# Altium PCB PCB1.PcbDoc
Units mm, origin at the board's own origin, x right, y up, seen from the top; angles counter-clockwise.
Board outline 150.1 x 97.45 mm, 2 copper layers (Top Layer, Bottom Layer); 78 components, 57 nets, 228 pads, 12 vias.
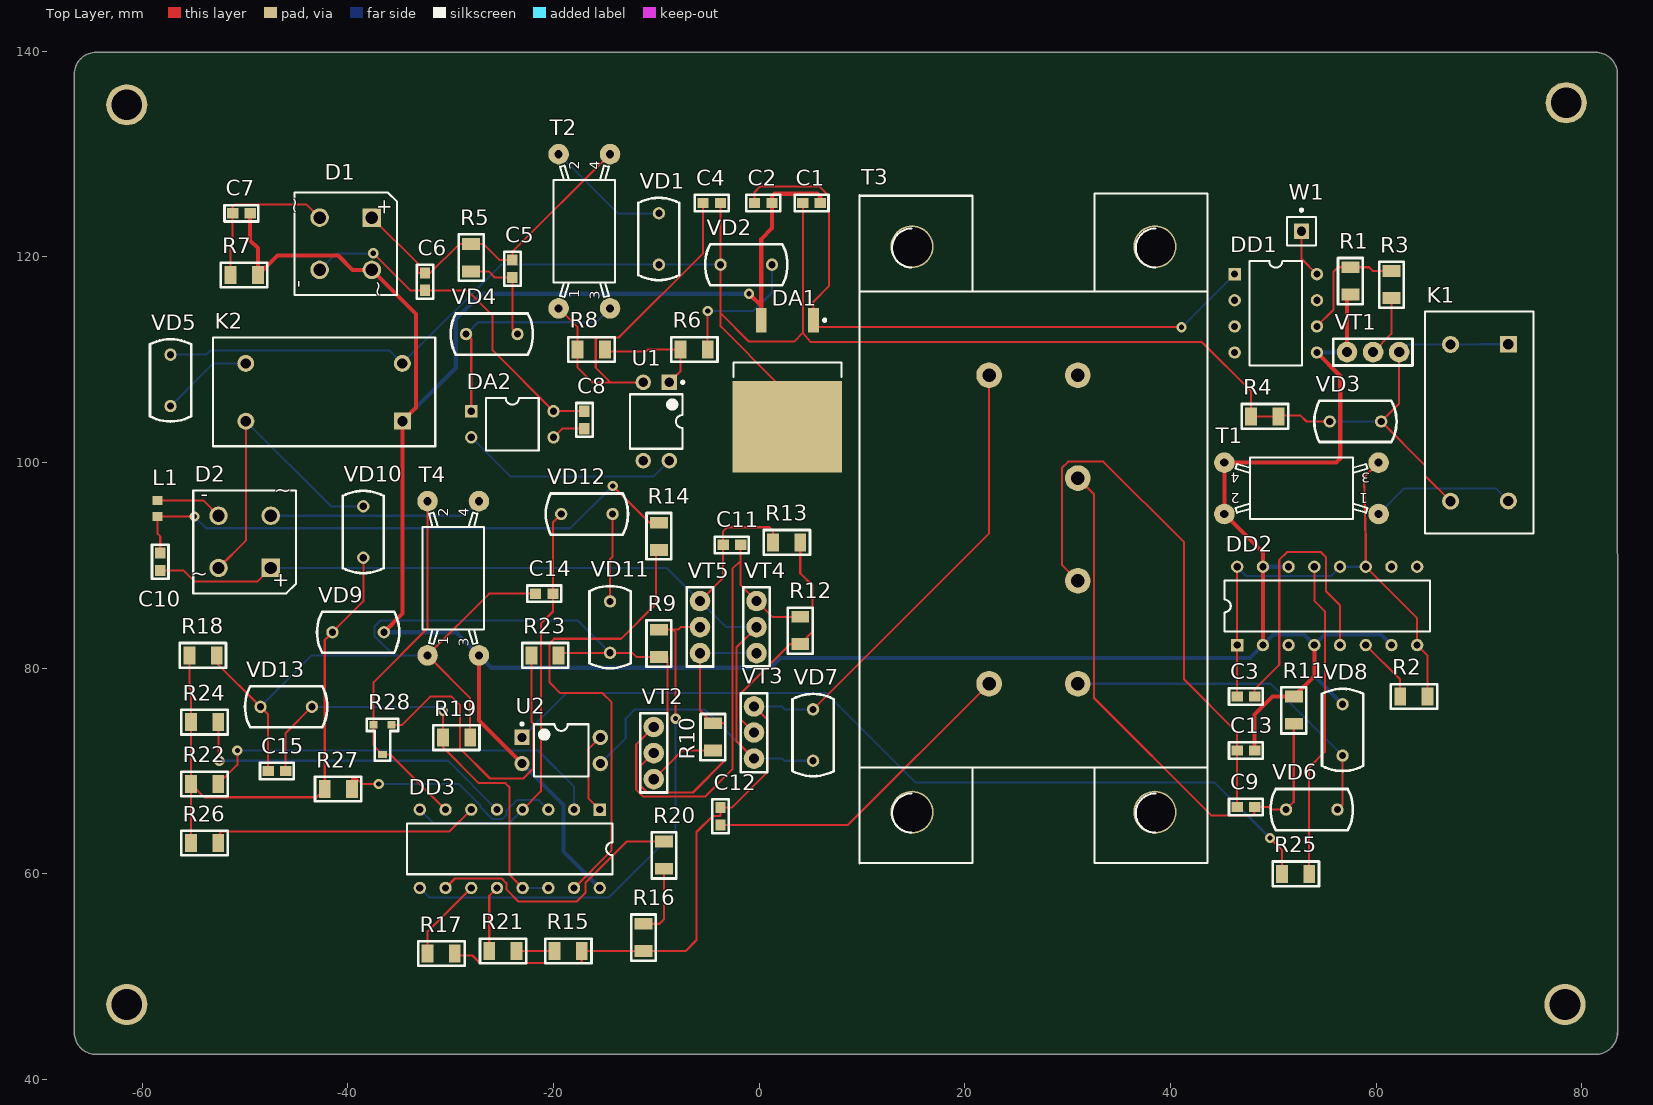
[diagram p0: Top Layer view]
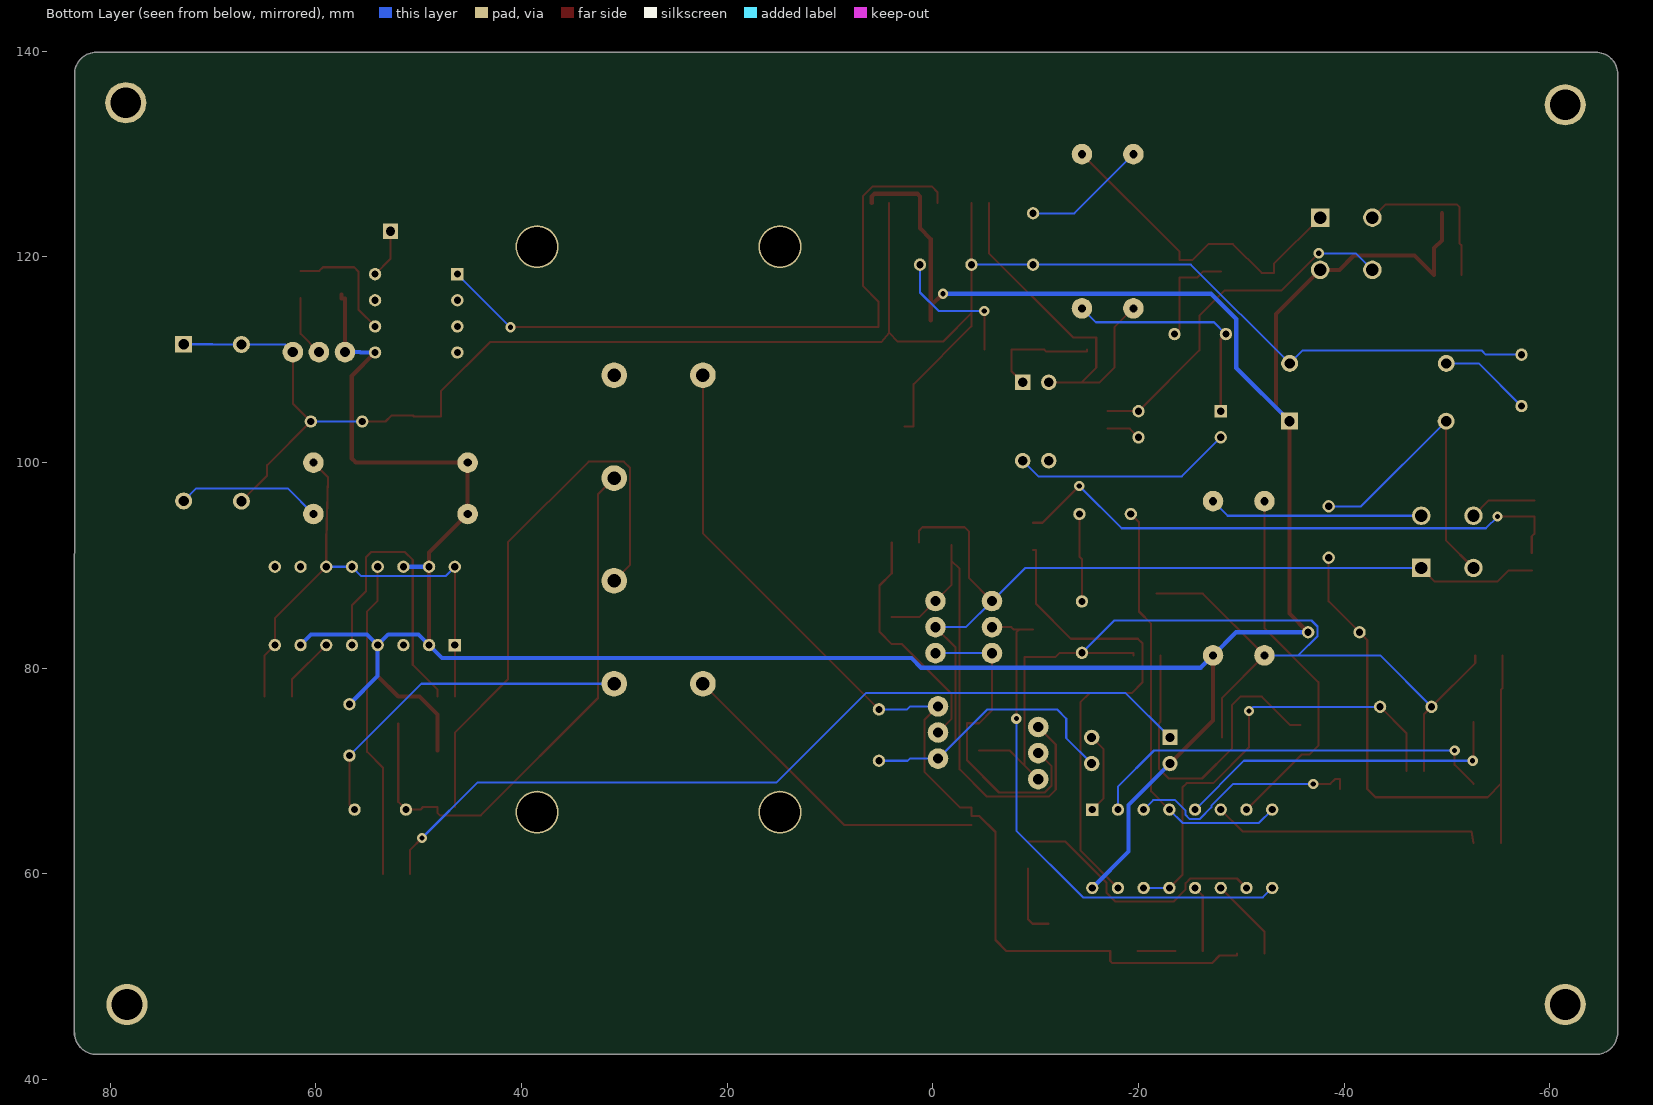
[diagram p1: Bottom Layer view, seen from below]

## Layer stack, top to bottom
Top Solder: solder mask 0.0102, Solder Resist, Dk 3.5
Top Layer: signal copper 0.0356
Dielectric 1: dielectric 0.32, FR-4, Dk 4.8
Bottom Layer: signal copper 0.0356
Bottom Solder: solder mask 0.0102, Solder Resist, Dk 3.5

## Board outline
-64.5,42.45 cw(c-64.5,44.55) -66.6,44.55 -66.6,44.75 -66.6,137.8 cw(c-64.5,137.8) -64.502,139.9 -64.5,139.9 81.376,139.9 cw(c81.375,137.8) 83.475,137.8 83.475,138 83.5,44.3 83.475,44.55 cw(c81.375,44.55) 81.375,42.45

## Design rules (kind name [scope] priority, off if disabled: settings)
Clearance [All] p1: gap=0.2 ignorepadtopadclearanceinfootprint=FALSE
ComponentClearance [All] p1: gap=0.3 collisioncheckmode=3 verticalgap=0.3 showdistances=FALSE
HoleSize [All] p1: absolutevalues=TRUE maxlimit=3.5 minlimit=0.025 maxpercent=80.000 minpercent=20.000
MinimumSolderMaskSliver [All] p1: minsoldermaskwidth=0
PolygonConnect [All] p1: connectstyle=Relief reliefconductorwidth=0.254 reliefentries=4 polygonreliefangle="90 Angle" airgapwidth=0.254
RoutingVias [All] p1: holewidth=0.5 width=1 viastyle="Through Hole" minholewidth=0.5 minwidth=1 maxholewidth=0.5 maxwidth=1
SilkToSilkClearance [All] p1: silktosilkclearance=0.1
SilkToSolderMaskClearance [IsPad] p1: minsilkscreentomaskgap=0.1 clearancetoexposedcopper=TRUE
SolderMaskExpansion [All] p1: expansion=0.102 istentingtop=FALSE
Width "VCC +9B" [InNet('VCC +9В')] p1: maxlimit=0.6 minlimit=0.3 preferedwidth=0.4
Width "VCC 12" [InNet('VCC 12')] p2: maxlimit=0.6 minlimit=0.3 preferedwidth=0.4
Width GND [InNet('GND')] p3: maxlimit=0.6 minlimit=0.3 preferedwidth=0.4
Width VCC [InNet('VCC')] p4: maxlimit=0.6 minlimit=0.3 preferedwidth=0.4
Width [All] p5: maxlimit=0.3 minlimit=0.15 preferedwidth=0.2
25 further rules are at their usual default settings.

## Components (designator, comment, footprint, x,y, rotation, side; value= is the part's Value field where it differs from the comment)
C1 "Capacitor" capasitor 4.25,125.25 r0 top
C2 "Capacitor" capasitor -0.45,125.25 r0 top
C3 "Capacitor" capasitor 48.2,77.25 r180 top
C4 "Capacitor" capasitor -5.45,125.25 r0 top
C5 "Capacitor" capasitor -24,118 r90 top
C6 "Capacitor" capasitor -32.5,116.75 r90 top
C7 "Capacitor" capasitor -51.2,124.25 r0 top
C8 "Capacitor" capasitor -17,105 r270 top
C9 "Capacitor" capasitor 48.2,66.5 r180 top
C10 "4/250V" capasitor -58.25,89.5 r90 top
C11 "0.66/500V" capasitor -3.5,92 r0 top
C12 "0.1/500V" capasitor -3.75,64.75 r90 top
C13 "Capacitor" capasitor 48.2,72 r180 top
C14 "Capacitor" capasitor -20.05,87.25 r180 top
C15 "Capacitor" capasitor -47.75,70 r0 top
D1 "Bridge1" D-38 -40.21,121.29 r270 top
D2 "Bridge1" D-38 -50.04,92.29 r180 top
DA1 "КP142ЕН8А" D2PAK_N 2.75,107.05 r270 top
DA2 "tiny-switch" DIP4 -28,105 r0 top
DD1 "ESP266" DIP8 46.25,118.33 r0 top
DD2 "TL494" DIP16 46.5,82.25 r90 top
DD3 "driver" DIP16 -15.5,66.25 r270 top
K1 "Relay-SPST" RELAY 71.15,104.69 r180 top
K2 "Relay-SPST" RELAY -41.5,105.75 r90 top
L1 "Inductor" Inductor -58.5,96.32 r270 top
R1 "Resistor_solo" RESISTOR 57.5,119 r270 top
R2 "Resistor_solo" RESISTOR 62.35,77.25 r0 top
R3 "Resistor_solo" RESISTOR 61.5,118.65 r270 top
R4 "Resistor_solo" RESISTOR 47.85,104.5 r0 top
R5 "Resistor_solo" RESISTOR -28,118.6 r90 top
R6 "Resistor_solo" RESISTOR -7.65,111 r0 top
R7 "Resistor_solo" RESISTOR -48.75,118.25 r180 top
R8 "Resistor_solo" RESISTOR -17.65,111 r0 top
R9 "Resistor_solo" RESISTOR -9.75,83.75 r270 top
R10 "Resistor_solo" RESISTOR -4.5,74.65 r270 top
R11 "R701" RESISTOR 52,77.25 r270 top
R12 "10K" RESISTOR 4,85 r270 top
R13 "Resistor_solo" RESISTOR 1.35,92.25 r0 top
R14 "200K" RESISTOR -9.75,91.5 r90 top
R15 "Resistor_solo" RESISTOR -19.9,52.5 r0 top
R16 "Resistor_solo" RESISTOR -11.25,55.15 r270 top
R17 "Resistor_solo" RESISTOR -32.25,52.25 r0 top
R18 "Resistor_solo" RESISTOR -52.75,81.25 r180 top
R19 "240" RESISTOR -28.1,73.25 r180 top
R20 "Resistor_solo" RESISTOR -9.25,63.15 r270 top
R21 "Resistor_solo" RESISTOR -26.25,52.5 r0 top
R22 "110K" RESISTOR -52.6,68.75 r180 top
R23 "Resistor_solo" RESISTOR -22.15,81.25 r0 top
R24 "Resistor_solo" RESISTOR -52.6,74.75 r180 top
R25 "Resistor_solo" RESISTOR 50.85,60 r0 top
R26 "56K" RESISTOR -52.6,63 r180 top
R27 "91K" RESISTOR -39.6,68.25 r180 top
R28 "Trimmer Resistor" "resistor changable" -35.75,74.5 r180 top
T1 "Trans" TRANS 52.75,97.5 r180 top
T2 "Trans" TRANS -17,122.5 r90 top
T3 "transfomComplicated" TRF_6 27.25,93.5 r0 top
T4 "Trans" TRANS -29.75,88.75 r90 top
U1 "Optoisolator1" DIP-4 -10,104 r270 top
U2 "Optoisolator1" DIP-4 -19.25,72 r0 top
VD1 "Zener diode" "zener dioide" -9.75,124.25 r270 top
VD2 "Zener diode" "zener dioide" 1.25,119.25 r180 top
VD3 "Diode" "zener dioide" 55.5,104 r0 top
VD4 "Diode" "zener dioide" -28.5,112.5 r0 top
VD5 "Diode" "zener dioide" -57.25,110.5 r270 top
VD6 "Diode" "zener dioide" 51.25,66.25 r0 top
VD7 "Diode" "zener dioide" 5.25,71 r90 top
VD8 "Diode" "zener dioide" 56.75,71.5 r90 top
VD9 "A6V71" "zener dioide" -36.5,83.5 r180 top
VD10 "A6V71" "zener dioide" -38.5,95.75 r270 top
VD11 "Zener diode" "zener dioide" -14.5,86.5 r270 top
VD12 "Zener diode" "zener dioide" -19.25,95 r0 top
VD13 "Zener diode" "zener dioide" -48.5,76.25 r0 top
VT1 "N-P-N Transistor_1" TRANSISTOR 62.25,110.75 r180 top
VT2 "N-P-N Transistor_1" TRANSISTOR -10.25,69.216 r90 top
VT3 "N-P-N Transistor_1" TRANSISTOR -0.5,76.284 r270 top
VT4 "P-N-P Transistor" TRANSISTOR -0.25,81.466 r90 top
VT5 "N-P-N Transistor_1" TRANSISTOR -5.75,81.466 r90 top
W1 "Antenna" PIN1 52.75,122.5 r0 top

## Footprints (in the part's own frame and the unit in brackets; to place one, negate y for a bottom-side part, rotate by r counter-clockwise, add the part's x,y. Pads: shape width x height; smd on the part's side, far side on the other; paste and mask are expansions set on the pad)
capasitor [mm] "common"
  rect 1.1x1 smd: 1(0,0) 2(1.7,0)
  silkscreen extent -0.8,-0.8 2.5,0.8
D2PAK_N [mm] "D2-PAK, 4-Leads, Body 8.8x10.4mm, Pitch 2.54mm, Lead Span 15.1mm, IPC Medium Density"
  rect 2.4x1.05 smd: 1(-6.8,2.54) 3(-6.8,-2.54)
  rect 8.9x10.65 smd: 2(3.55,0)
  silkscreen extent -6.92,-5.25 -1.3,5.25, body extent -2.7,-5.28 6.3,5.28, height 4.69
D-38 [mm] "Bridge Rectifier; 4 Terminals; Body 9.4 x 9.4 mm (typ); Pitch 5.08 mm"
  rect 1.8x1.8 hole 1.2: 1(-2.54,2.54)
  round 1.8 hole 1.2: 2(-2.54,-2.54) 3(2.54,-2.54) 4(2.54,2.54)
  silkscreen extent -5,-5 5,5, body extent -5,-5 5,5, height 9.91
DIP4 [mm]
  rect 1.2x1.2 hole 0.7: 1(0,0)
  round 1.2 hole 0.7: 2(0,-2.54) 3(8,-2.54) 4(8,0)
  silkscreen extent 1.44,-3.81 6.57,1.27
DIP8 [mm]
  rect 1.2x1.2 hole 0.7: 1(0,0)
  round 1.2 hole 0.7: 2(0,-2.54) 3(0,-5.08) 4(0,-7.62) 5(8,-7.62) 6(8,-5.08) 7(8,-2.54) 8(8,0)
  silkscreen extent 1.44,-8.89 6.57,1.27
DIP16 [mm]
  rect 1.2x1.2 hole 0.7: 1(0,0)
  round 1.2 hole 0.7: 2(0,-2.5) 3(0,-5) 4(0,-7.5) 5(0,-10) 6(0,-12.5) 7(0,-15) 8(0,-17.5) 9(7.62,-17.5) 10(7.62,-15) 11(7.62,-12.5) 12(7.62,-10) 13(7.62,-7.5) 14(7.62,-5) 15(7.62,-2.5) 16(7.62,0)
  silkscreen extent 1.33,-18.75 6.28,1.25
DIP-4 [mm] "DIP; 4 Leads; Row Spacing 7.62 mm; Pitch 2.54 mm"
  rect 1.5x1.5 hole 0.9: 1(-3.81,1.27)
  round 1.5 hole 0.9: 2(-3.81,-1.27) 3(3.81,-1.27) 4(3.81,1.27)
  silkscreen extent -3.93,-2.55 2.65,2.7, body extent -3.15,-2.5 3.15,2.5, height 5.6
Inductor [mm] "*"
  rect 0.9x0.97 smd: 1(0,0) 2(1.57,0)
PIN1 [mm] "Generic Antenna; 1 Lead"
  rect 1.5x1.5 hole 0.9: 1(0,0)
  silkscreen extent -1.4,-1.4 1.4,2.17
RELAY [mm] "DIP; 4 Round Pins; Row Space 27.94 mm; Pitch 15.24 mm"
  rect 1.65x1.65 hole 1: 1(-1.724,-6.82)
  round 1.65 hole 1: 2(-1.724,8.42) 3(3.9,-6.8) 4(3.9,8.44)
  silkscreen extent -4.16,-10 6.4,11.6
RESISTOR [mm]
  rect 1.15x1.75 smd: 1(0,0) 2(2.65,0)
  silkscreen extent -0.9,-1.2 3.6,1.2
"resistor changable" [mm] "Trimmer Resistor -Murata"
  rect 0.75x0.7 smd: 1(0,0) 3(1.75,0)
  rect 0.9x0.7 smd: 2(0.875,2.9)
  silkscreen extent -0.65,-0.6 2.4,3.5
TRANS [mm] "Transformer; 4 Leads"
  round 2 hole 0.8: 1(-7.5,2.5) 2(7.5,2.5) 3(-7.5,-2.5) 4(7.5,-2.5)
  silkscreen extent -6.4,-3 6.4,3
TRANSISTOR [mm] "KT315"
  round 2 hole 1: 1(0,0) 2(2.534,0) 3(5.069,0)
  silkscreen extent -1.3,-1.3 6.4,1.3
TRF_6 [mil] "Transformer; 6 Leads"
  round 98 hole 52: 1(-192.31,590.83) 2(-192.31,-590.83) 3(147.69,590.83) 4(147.69,196.67) 5(147.69,-196.67) 6(147.69,-590.83)
  round 165 hole 152: MH1(-487.31,-1082.69) MH2(442.69,-1082.69) MH3(442.69,1082.69) MH4(-487.31,1082.69)
  silkscreen extent -689,-1280 645,1286
"zener dioide" [mm] "КС162А"
  round 1.2 hole 0.7: 1(0,0) 2(5,0)
  silkscreen extent -1.5,-2 6.5,2

## Part data
C1 C2 C3 C4 C5 C6 C7 C8 C9 C13 C14 C15 L1 R1 R2 R3 R4 R5 R6 R7 R8 R9 R10 R13 R15 R16 R17 R18 R20 R21 R23 R24 R25 R28 VD1 VD2 VD3 VD4 VD5 VD6 VD7 VD8 VD11 VD12 VD13 VT1 VT2 VT3 VT4 VT5: "*"
C10 C11 C12: library part Capacitor, "*"
D1 D2: "Full Wave Diode Bridge", DatasheetVersion=E2732B, LatestRevisionDate=29-May-2009, LatestRevisionNote="Sch pins A & K swapped.", PackageDescription="Bridge Rectifier; 4 Terminals; Body 9.4 x 9.4 mm (typ); Pitch 5.08 mm", PackageReference=D-38, Published=8-Jun-2000, Publisher="Altium Limited"
K1 K2: "Single-Pole Single-Throw Relay", LatestRevisionDate=17-Jul-2002, LatestRevisionNote="Re-released for DXP Platform.", PackageReference=MODULE4, Published=24-Mar-1999, Publisher="Altium Limited"
R11 R12 R14 R19 R22 R26 R27: library part Resistor_solo, "*"
T1 T2 T4: "Transformer", LatestRevisionDate=08-Jul-2005, LatestRevisionNote="Mech Layer 1 removed.", PackageDescription="Transformer; 4 Leads", PackageReference=TRANS, Published=24-Mar-1999, Publisher="Altium Limited"
U1 U2: "4-Pin Phototransistor Optocoupler", DatasheetVersion=Nov-2003, LatestRevisionDate=04-Mar-2005, LatestRevisionNote="Sch pins 3 & 4 Swapped.", PackageReference=DIP-4, Published=24-Mar-1999, Publisher="Altium Limited"
VD9 VD10: library part Diode, "*"
W1: "Generic Antenna", LatestRevisionDate=17-Jul-2002, LatestRevisionNote="Re-released for DXP Platform.", PackageReference=PIN1, Published=24-Mar-1999, Publisher="Altium Limited"

## Free pads (board coordinates)
  round 4 hole 3: ""(-61.5,47.3) ""(-61.5,134.8) ""(78.375,47.3) ""(78.5,135)

## Via types
v1: diameter 1, hole 0.5, Top Layer to Bottom Layer, 11 vias
v2: diameter 1/1 (per signal layer), hole 0.5, Top Layer to Bottom Layer, 1 vias

## Nets (pads, with @x,y where several pads share a name; then routed paths per layer and width w, separated by ;. In a path a pad name is that pad's centre, name@x,y a point inside that pad or via, vN(x,y) a via of type N, cw(c..) or ccw(c..) an arc to the next point about the centre after c; other vN are vias at no path point)
GND: C1.2 C2.2 C7.2 C13.1 D1.4 DA1.3 DD1.5 DD2.2 DD2.4 DD2.7 DD2.14 DD2.15 DD3.16 K2.1 R1.2 R7.1 R11.1 T1.2 T1.4 T4.3 U2.2 VD8.2 VD9.1 VT1.3 | length 322.1
  Top Layer w0.4: C7.2 -49.5,121.617 -48.75,120.867 R7.1 -46.844,120.156 -40.937,120.156 -39.531,118.75 D1.4 -33.368,114.448 -33.368,105.338 K2.1 -34.68,85.32 VD9.1 ; T4.3 -27.25,74.92 U2.2 ; v1(-0.984,116.422) 0.21,115.228 ; DA1.3 0.21,115.228 ; C1.2 5.95,125.896 5.696,126.15 1.504,126.15 1.25,125.896 C2.2 1.25,122.797 0.21,121.757 0.21,115.228 ; C13.1 48.2,75.506 49.944,77.25 R11.1 54,79.25 DD2.4 ; DD2.2 DD2.15 49,91.25 T1.2 T1.4 56.128,100 56.523,100.395 56.523,108.437 DD1.5 ; VT1.3 57.181,115.975 57.5,115.975 R1.2
  Bottom Layer w0.4: VD9.1 -29.5,83.5 T4.3 -26.049,80.049 1.151,80.049 2.091,80.989 47.739,80.989 DD2.2 50.025,83.275 52.975,83.275 DD2.4 ; K2.1 -29.507,109.199 -29.507,113.984 -27.068,116.422 v1(-0.984,116.422) ; U2.2 -19.042,66.712 -19.042,62.172 DD3.16 ; DD2.15 DD2.14 ; DD1.5 55.685,110.71 55.725,110.75 VT1.3 ; VD8.2 54,79.25 DD2.4 ; DD2.7 60.475,83.275 55.025,83.275 DD2.4
Net*1_5: C9.1 R11.2 T3.4 VD6.1 | length 54.9
  Top Layer w0.2: T3.4 32.571,96.926 32.571,77.103 43.975,65.698 47.946,65.698 48.2,65.952 C9.1 49.589,66.5 49.839,66.25 VD6.1 52,67 R11.2
Net*1_6: T3.3
NetC1_1: C1.1 C4.2 DA1.2 K1.1 K1.3 K1.4 K2.3 R4.1 R4.2 VD1.2 VD2.2 VD3.1 VD3.2 VD5.1 VT1.1 | length 195.6
  Top Layer w0.2: C4.2 -3.75,122.239 VD2.2 -3.75,114.541 ; DA1.2 1.863,103.5 1.863,107.634 -3.75,113.247 -3.75,114.541 ; C1.1 4.25,112.612 ; VD3.1 53.238,104 52.65,104.589 50.5,104.589 R4.2 R4.1 47.85,106.948 43.075,111.723 5.012,111.723 4.25,112.612 ; VT1.1 62.25,105.75 VD3.2 64.753,99.747 64.753,98.747 K1.4 ; -3.75,114.541 -0.983,111.774 3.412,111.774 4.25,112.612
  Bottom Layer w0.2: VD5.1 -53.789,110.5 -53.404,110.885 -35.935,110.885 K2.3 -25.1,119.25 VD1.2 VD2.2 ; VD3.1 VD3.2 ; VT1.1 62.99,111.49 K1.3 70.036,111.49 70.056,111.51 K1.1
NetC2_1: C2.1 DA1.1 DD1.1 | length 65.4
  Top Layer w0.2: C2.1 -0.45,126.303 0.109,126.861 5.85,126.861 6.815,125.896 6.815,117.185 5.29,115.66 DA1.1 5.29,113.171 v1(41.091,113.171)
  Bottom Layer w0.2: v1(41.091,113.171) DD1.1
NetC3_1: C3.1 DD2.5 | length 28.5
  Top Layer w0.2: C3.1 48.2,77.941 50.588,80.329 50.588,90.539 51.35,91.301 54.618,91.301 55.151,90.768 55.151,87.466 56.5,86.117 DD2.5
NetC3_2: C3.2 DD2.1 DD2.8 DD2.11 DD2.12 DD2.16 R2.2 T1.3 | length 51.7
  Top Layer w0.2: C3.2 DD2.1 DD2.16 ; T1.3 58.834,98.584 59,92.343 DD2.11 64,84.87 DD2.8 65,81.25 R2.2
  Bottom Layer w0.2: DD2.16 47.405,88.965 55.595,88.965 DD2.12 DD2.11
NetC4_1: C4.1 R8.1 T2.1 U1.2 | length 37.2
  Top Layer w0.2: T2.1 -17.65,113.15 R8.1 -17.65,109.234 -16.226,107.81 -14.47,107.81 ; U1.2 -14.47,107.81 ; C4.1 -5.45,120.362 -13.632,112.18 -15.892,112.18 -15.892,109.232 -14.47,107.81
NetC5_1: C5.1 R5.1 VD4.2 | length 10
  Top Layer w0.2: R5.1 -26.306,118.6 -25.706,118 C5.1 -24,113 VD4.2
NetC5_2: C5.2 C6.2 D1.1 R5.2 T2.4 | length 32.4
  Top Layer w0.2: D1.1 -33.164,119.324 -33.164,118.45 C6.2 -31.977,118.45 -29.177,121.25 R5.2 -26.789,121.25 -25.239,119.7 C5.2 -24,120.5 T2.4
NetC6_1: C6.1 C8.1 D1.3 DA2.4 | length 34.7
  Top Layer w0.2: v1(-37.535,120.359) -33.926,116.75 C6.1 -28.389,116.75 -25.925,114.286 -25.925,110.925 DA2.4 C8.1
  Bottom Layer w0.2: D1.3 -41.141,120.359 v1(-37.535,120.359)
NetC7_1: C7.1 D1.2 R7.2 | length 15.8
  Top Layer w0.2: R7.2 -51.4,121.146 -51.2,121.346 C7.1 -51.2,124.88 -50.997,125.083 -44.003,125.083 D1.2
NetC8_2: C8.2 DA2.3 | length 3.3
  Top Layer w0.2: DA2.3 -19.16,103.3 C8.2
NetC9_2: C9.2 C13.2 T3.5 | length 54.9
  Top Layer w0.2: T3.5 29.447,90.059 29.447,99.48 30.056,100.09 33.485,100.09 41.334,92.241 41.334,78.906 46.5,73.74 C13.2 C9.2
NetC10_1: C10.1 C11.1 D2.1 R13.1 U2.3 VD7.1 VT3.3 VT4.2 VT5.3 | length 115.7
  Top Layer w0.2: C10.1 -55.974,89.5 -54.905,88.431 -48.819,88.431 D2.1 ; VT5.3 -3.5,88.784 C11.1 -3.5,93.305 -3.091,93.714 1.02,93.714 1.35,93.384 R13.1 ; VT3.3 -2.2,72.916 -2.2,82.05 VT4.2
  Bottom Layer w0.2: D2.1 -8.966,89.75 VT5.3 -3.216,84 VT4.2 ; U2.3 -12.971,73.199 -12.971,75.096 -12.082,75.985 -5.27,75.985 VT3.3 2.243,71.216 2.459,71 VD7.1
NetC10_2: C10.2 L1.2 R14.2 | length 56.1
  Top Layer w0.2: C10.2 -58.25,92.825 -58.5,93.075 L1.2 v1(-54.926,94.75) ; v1(-14.238,97.728) -10.66,94.15 R14.2
  Bottom Layer w0.2: v1(-54.926,94.75) -53.789,93.613 -18.352,93.613 v1(-14.238,97.728)
NetC11_2: C11.2 R12.1 VT2.3 VT4.3 | length 49.1
  Top Layer w0.2: VT2.3 -11.95,72.584 -11.95,68.187 -11.278,67.516 -5.261,67.516 -2.6,70.177 -2.6,89.659 -1.8,90.459 ; C11.2 -1.8,90.459 ; R12.1 1.284,85 VT4.3 -1.8,88.084 -1.8,90.459
NetC12_1: C12.1 T3.2 | length 31.8
  Top Layer w0.2: C12.1 8.623,64.75 T3.2
NetC12_2: C12.2 R15.2 R16.2 R17.2 T3.1 VD7.2 VT3.1 | length 98.2
  Top Layer w0.2: R17.2 -29.6,52.058 -27.881,52.058 -27.145,51.322 -17.453,51.322 -17.25,51.525 R15.2 R16.2 -7.155,52.5 -6.088,53.567 -6.088,64.073 -4.539,65.622 -3.75,65.622 C12.2 -2.644,66.45 0.821,69.915 0.821,74.964 VT3.1 ; VD7.2 22.365,93.115 T3.1
  Bottom Layer w0.2: VT3.1 2.218,76.284 2.502,76 VD7.2
NetC14_1: C14.1 DD3.4 DD3.8 VD12.1 | length 41.4
  Top Layer w0.2: DD3.4 -21.226,68.024 -21.226,84.342 -20.05,85.518 C14.1 -20.05,94.2 VD12.1
  Bottom Layer w0.2: DD3.8 -31.7,64.95 -24.3,64.95 DD3.4
NetC14_2: C14.2 C15.1 R9.2 R10.2 R18.1 R19.1 R23.2 T4.1 VD11.2 VD13.1 VT2.1 | length 110.8
  Top Layer w0.2: R18.1 -52.75,80.5 VD13.1 -47.75,75.5 C15.1 ; R19.1 -28.1,77.1 T4.1 -26.25,87.25 C14.2 ; R23.2 -19.5,81.5 VD11.2 -12.336,81.5 -11.936,81.1 R9.2 -8.933,81.1 -8.933,70.533 ; VT2.1 -8.933,70.533 ; R10.2 -7.466,72 -8.933,70.533
  Bottom Layer w0.2: VD13.1 -43.5,81.25 -35.534,81.25 ; T4.1 -35.534,81.25 ; VD11.2 -17.647,84.647 -36.822,84.647 -37.406,84.062 -37.406,83.123 -35.534,81.25
NetC15_2: C15.2 DD3.13 DD3.14 R19.2 VD13.2 | length 44.7
  Top Layer w0.2: C15.2 -46.05,73.7 VD13.2 ; v1(-30.75,75.833) R19.2 -30.75,72.301 -27.27,68.821 -24.679,68.821 -24.274,68.416 -24.274,59.904 DD3.13
  Bottom Layer w0.2: VD13.2 -31.167,76.25 v1(-30.75,75.833) ; DD3.13 DD3.14
NetD2_2: D2.2 T4.4 | length 20.8
  Bottom Layer w0.2: D2.2 -28.67,94.83 T4.4
NetD2_3: D2.3 L1.1 | length 6.5
  Top Layer w0.2: L1.1 -54.07,96.32 D2.3
NetD2_4: D2.4 K2.2 VD10.1 | length 30.2
  Top Layer w0.2: D2.4 -49.92,92.41 K2.2
  Bottom Layer w0.2: K2.2 -41.644,95.75 VD10.1
NetDA2_1: DA2.1 T2.3 VD4.1 | length 22.7
  Top Layer w0.2: VD4.1 -28,112 DA2.1
  Bottom Layer w0.2: VD4.1 -27.347,113.653 -15.847,113.653 T2.3
NetDA2_2: DA2.2 U1.4 | length 21.5
  Bottom Layer w0.2: DA2.2 -24.207,98.667 -10.253,98.667 U1.4
NetDD1_6: DD1.6 R1.1 R3.1 | length 12
  Top Layer w0.2: DD1.6 55.863,114.863 55.863,118.581 56.282,119 R1.1 59.317,119 59.667,118.65 R3.1
NetDD1_8: DD1.8 W1.1 | length 4.8
  Top Layer w0.2: W1.1 52.75,119.83 DD1.8
NetDD2_6: DD2.6 R2.1 | length 6.4
  Top Layer w0.2: DD2.6 62.35,78.9 R2.1
NetDD2_13: DD2.13 R25.2 | length 30.9
  Top Layer w0.2: R25.2 53.5,70.346 55.024,71.871 55.024,85.536 54,86.56 DD2.13
NetDD3_1: DD3.1 U2.4 | length 8
  Top Layer w0.2: DD3.1 -16.604,67.354 -16.604,72.106 U2.4
NetDD3_2: DD3.2 R22.1 | length 40.5
  Top Layer w0.2: R22.1 -50.75,70.6 v2(-50.75,72)
  Bottom Layer w0.2: v2(-50.75,72) -21.508,72 -18,68.492 DD3.2
NetDD3_3: DD3.3 R27.1 | length 23.2
  Top Layer w0.2: R27.1 -39.6,69.225 -39.13,69.225 -38.655,68.75 v1(-37,68.75)
  Bottom Layer w0.2: v1(-37,68.75) -29.227,68.75 -27.094,66.617 -27.094,66.46 -25.984,65.35 -24.953,65.35 -24.579,65.724 -24.579,66.155 -23.563,67.171 -21.421,67.171 DD3.3
NetDD3_5: DD3.5 R24.1 | length 32.8
  Top Layer w0.2: R24.1 -52.6,71.1 v1(-52.5,71)
  Bottom Layer w0.2: v1(-52.5,71) -30.25,71 DD3.5
NetDD3_6: DD3.6 R26.1 | length 26.4
  Top Layer w0.2: R26.1 -52.397,64.123 -30.127,64.123 DD3.6
NetDD3_7: DD3.7 R28.2 R28.3 T4.2 | length 35.5
  Top Layer w0.2: T4.2 -32.25,83.902 -37.5,78.652 R28.3 -37.5,72.475 R28.2 -35.85,71.6 DD3.7
NetDD3_9: DD3.9 R9.1 VT5.2 | length 51.7
  Top Layer w0.2: R9.1 -8.374,83.75 ; v1(-8.12,75.096) -8.12,83.496 -8.374,83.75 ; VT5.2 -7.641,84 -7.891,83.75 -8.374,83.75
  Bottom Layer w0.2: DD3.9 -32.093,57.723 -14.597,57.723 -8.12,64.2 v1(-8.12,75.096)
NetDD3_10: DD3.10 R20.1 | length 25.9
  Top Layer w0.2: DD3.10 -29.579,59.551 -25.036,59.551 -24.579,59.094 -24.579,58.485 -23.411,57.316 -17.721,57.316 -16.883,58.154 -16.883,59.137 -12.87,63.15 R20.1
NetDD3_11: DD3.11 R17.1 | length 8.1
  Top Layer w0.2: R17.1 -32.25,54.38 DD3.11
NetDD3_12: DD3.12 R21.1 | length 6.4
  Top Layer w0.2: R21.1 -26.25,57.88 DD3.12
NetDD3_15: DD3.15 R14.1 | length 47.7
  Top Layer w0.2: DD3.15 -14.368,62.262 -14.368,76.722 -15.232,77.585 -19.347,77.585 -20.388,78.627 -20.388,82.411 -19.931,82.869 -13.429,82.869 -10.05,86.247 -10.05,91.5 R14.1
NetK1_2: K1.2 T1.1 | length 14.2
  Bottom Layer w0.2: T1.1 62.749,97.499 71.645,97.499 K1.2
NetK2_4: K2.4 VD5.2 | length 9
  Bottom Layer w0.2: VD5.2 -53.1,109.65 K2.4
NetR3_2: R3.2 VT1.2 | length 6
  Top Layer w0.2: VT1.2 61.5,112.534 R3.2
NetR6_1: R6.1 R8.2 U1.1 | length 11.2
  Top Layer w0.2: R8.2 -15,110.822 -10.995,110.822 -10.817,111 R6.1 -7.65,108.89 U1.1
NetR6_2: R6.2 VD2.1 | length 13.4
  Top Layer w0.2: R6.2 v1(-5,114.746)
  Bottom Layer w0.2: v1(-5,114.746) -0.553,114.746 1.25,116.549 VD2.1
NetR10_1: R10.1 VT2.2 VT4.1 VT5.1 | length 31.1
  Top Layer w0.2: VT2.2 -11.55,70.45 -11.55,68.594 -10.872,67.916 -6.436,67.916 -3.319,71.032 -3.319,74.65 R10.1 -5.75,75.9 VT5.1
  Bottom Layer w0.2: VT5.1 VT4.1
NetR12_2: R12.2 R13.2 VT3.2 | length 23
  Top Layer w0.2: VT3.2 -1.8,75.05 -1.8,77.545 3.005,82.35 R12.2 5.19,83.54 5.19,88.05 4,89.24 R13.2
NetR15_1: R15.1 R21.2 | length 3.7
  Top Layer w0.2: R21.2 R15.1
NetR16_1: R16.1 R20.2 | length 7.1
  Top Layer w0.2: R16.1 -9.689,55.15 -9.25,55.589 R20.2
NetR18_2: R18.2 R22.2 R24.2 R26.2 R27.2 VD9.2 VD10.2 | length 56.2
  Top Layer w0.2: R18.2 -55.4,78.066 -55.25,77.916 R24.2 R22.2 ; R26.2 R22.2 ; VD10.2 -38.5,86.5 VD9.2 -42.25,82.75 R27.2 -43.049,67.451 -53.951,67.451 R22.2
NetR23_1: R23.1 R28.1 | length 32.1
  Top Layer w0.2: R28.1 -34.726,74.5 -31.996,77.23 -29.913,77.23 -29.075,76.392 -29.075,72.177 -26.178,69.28 -22.928,69.28 -21.988,70.219 -21.988,74.655 -22.15,74.817 R23.1
NetR25_1: R25.1 U2.1 | length 84.3
  Top Layer w0.2: v1(49.69,63.488) 50.85,62.329 R25.1
  Bottom Layer w0.2: U2.1 -18.745,77.585 6.51,77.585 15.197,68.899 44.28,68.899 v1(49.69,63.488)
NetT2_2: T2.2 VD1.1 | length 12.1
  Bottom Layer w0.2: T2.2 -13.75,124.25 VD1.1
NetT3_6: T3.6 VD6.2 VD8.1 | length 34.1
  Top Layer w0.2: VD6.2 56.75,66.75 VD8.1
  Bottom Layer w0.2: T3.6 49.757,78.493 VD8.1
NetVD11_1: VD11.1 VD12.2 | length 8.6
  Top Layer w0.2: VD11.1 -14.5,90.616 -14.25,90.866 VD12.2
pads on no net: DD1.2 DD1.3 DD1.4 DD1.7 DD2.3 DD2.9 DD2.10 T3.MH1 T3.MH2 T3.MH3 T3.MH4 U1.3

## Silkscreen, mask and mechanical layers (free items; w line width, h text height)
Mechanical 15:
  lines w1.2: -66.6,44.301 ccw(c-66.5,44.3) -66.6,44.3 ccw(c-64.5,44.3) -66.6,44.294 -66.6,44.175 ccw(c-66.5,44.175) -66.594,44.141 ; -66.6,44.55 ccw(c-64.5,44.55) -64.5,42.45 81.375,42.45 ccw(c81.375,44.55) 83.475,44.55 ; -66.6,137.799 -66.6,137.8 ; 83.475,137.8 ccw(c81.375,137.8) 81.376,139.9 -64.5,139.9 ccw(c-64.5,139.8) -64.502,139.9 ccw(c-64.5,137.8) -66.6,137.8 ; 83.475,138 83.5,44.3 ; -66.6,44.75 -66.6,44.75 ; -66.6,44.75 -66.6,137.8 ; -66.594,44.141 -66.594,44.141

## Text inside footprints (layer, text, board x,y; h text height)
D1: Top Overlay "+" at -37.046,125.7 h1.5 r270; Top Overlay "-" at -45.29,117.734 h1.5 r270; Top Overlay "~" at -45.798,125.862 h1.5 r270; Top Overlay "~" at -37.67,117.734 h1.5 r270
D2: Top Overlay "+" at -45.63,89.126 h1.5 r180; Top Overlay "-" at -53.596,97.37 h1.5 r180; Top Overlay "~" at -45.468,97.878 h1.5 r180; Top Overlay "~" at -53.596,89.75 h1.5 r180
T1: Top Overlay "1" at 59.25,97 h1 r180; Top Overlay "2" at 46.75,97 h1 r180; Top Overlay "3" at 59.425,99 h1 r180; Top Overlay "4" at 46.75,99 h1 r180
T2: Top Overlay "1" at -17.5,116 h1 r90; Top Overlay "2" at -17.5,128.5 h1 r90; Top Overlay "3" at -15.5,115.825 h1 r90; Top Overlay "4" at -15.5,128.5 h1 r90
T4: Top Overlay "1" at -30.25,82.25 h1 r90; Top Overlay "2" at -30.25,94.75 h1 r90; Top Overlay "3" at -28.25,82.075 h1 r90; Top Overlay "4" at -28.25,94.75 h1 r90